# EAGLE board hbridge3 (EAGLE 7.1.0)

No outline drawn. Coordinates in mm, seen from the top.
Copper layers (1*16): Top 0.035mm / dielectric 1.5mm / Bottom 0.035mm
Design rules "default": minimum track width 10mil, minimum drill 24mil, track to track 8mil, track to pad 8mil, pad to pad 8mil, via to via 8mil, smd to smd 8mil, copper to edge 40mil, drill to drill 8mil, minimum pad ring 10mil, minimum via ring 8mil, stop-mask expansion 4mil, vias tented up to drill 0mil, thermal gap 10mil
Net classes: 0 default: width 0.203 mm; 1 vcc: width 0.254 mm

## Footprints (pad centres in the part's own frame; a part is rotated, then mirrored left to right if it is on the bottom)
DO-214AC = smd 1.8 x 2.4: A 2.025,0; C -2.025,0
1X02 = drill 1.016 pad 1.88: 1 0,0; 2 2.54,0
SOT-23 = smd 0.8 x 0.9: 1 -0.95,-1; 2 0.95,-1; 3 0,1.1
R0603 = smd 1 x 1.1: 1 -0.85,0; 2 0.85,0

## Placement (x,y rotation side)
D2  [DO-214AC]  80.26,13.34 270 bottom
D3  [DO-214AC]  80.14,25.65 90 bottom
D4  [DO-214AC]  80.21,19.43 270 bottom
D5  [DO-214AC]  80.14,32 90 bottom
JP1  [1X02]  89.41,13.59 90 top
JP2  [1X02]  61.85,29.59 270 top
JP4  [1X02]  68.83,14.99 90 top
Q2  IRLML0060  [SOT-23]  77.07,13.73 0 top
Q3  IRLML0060  [SOT-23]  76.35,25.27 180 bottom
Q4  IRLML0060  [SOT-23]  84.09,19.7 0 bottom
Q5  IRLML0060  [SOT-23]  83.54,31.67 180 top
R1  10K  [R0603]  77.09,11.3 180 top
R7  10K  [R0603]  83.44,34.16 0 top

## Library data of the parts
D2-D5 = diode
JP1 JP2 JP4 = SparkFun-Connectors
Q2-Q5 = spietz-library
R1 R7 = resistor

## Nets
COILA1: D2.C D4.A JP4.1 Q2.3 Q4.2
COILA2: D3.A D5.C JP4.2 Q3.2 Q5.3
GATEA1: JP1.2 Q4.1 Q5.1 R7.2
GATEA2: JP1.1 Q2.1 Q3.1 R1.2
GND: D2.A D5.A JP2.1 Q2.2 Q5.2 R1.1 R7.1
VCC: D3.C D4.C JP2.2 Q3.3 Q4.3

## Tracks (layer width: path | path; a pad name or v marks a point on that pad's centre or on a via)
COILA1  (4 unrouted)
COILA2  (4 unrouted)
GATEA1  (3 unrouted)
GATEA2  (3 unrouted)
GND  (6 unrouted)
VCC  (4 unrouted)

## Text on the board
tPlace: GND | + | coil | gate1 | gate2